# Altium PCB Sensor_Box_GPRS.PCBDOC
Units mm, origin at the board's own origin, x right, y up, seen from the top; angles counter-clockwise.
Board outline 45 x 72.8 mm, 2 copper layers (Top, Bot), stack 1.571 mm thick; 46 components, 47 nets, 198 pads, 98 vias.
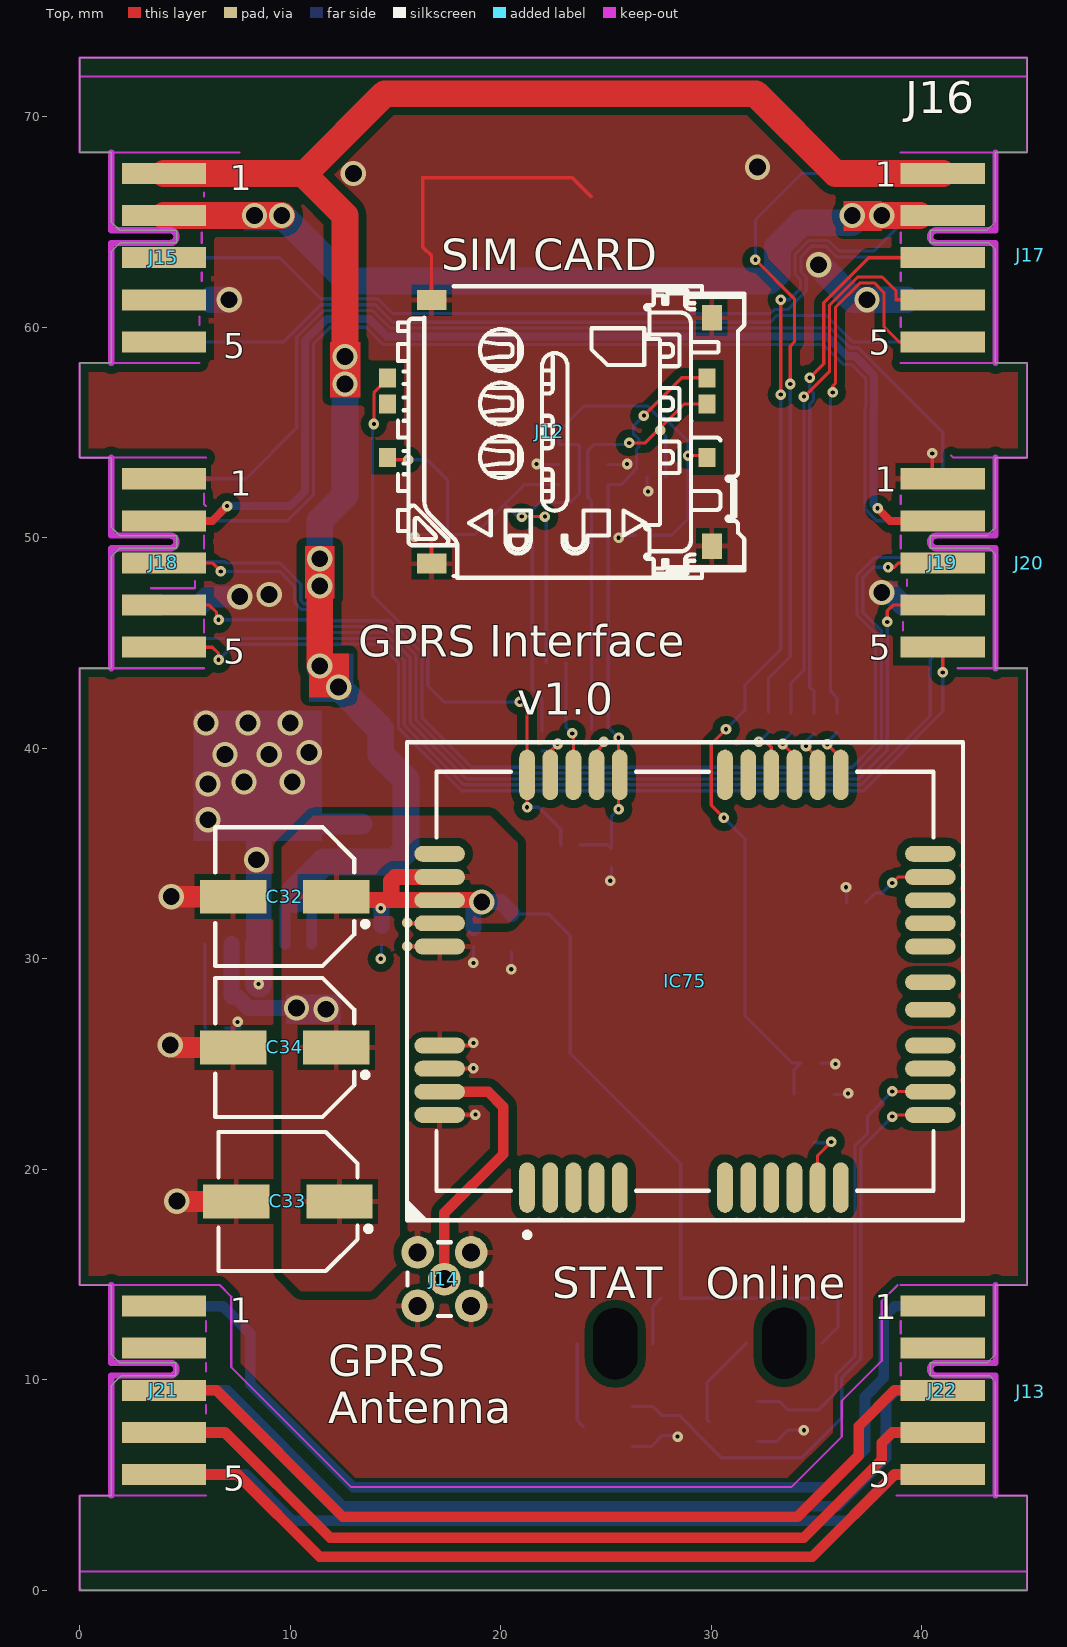
[diagram p0: Top view]
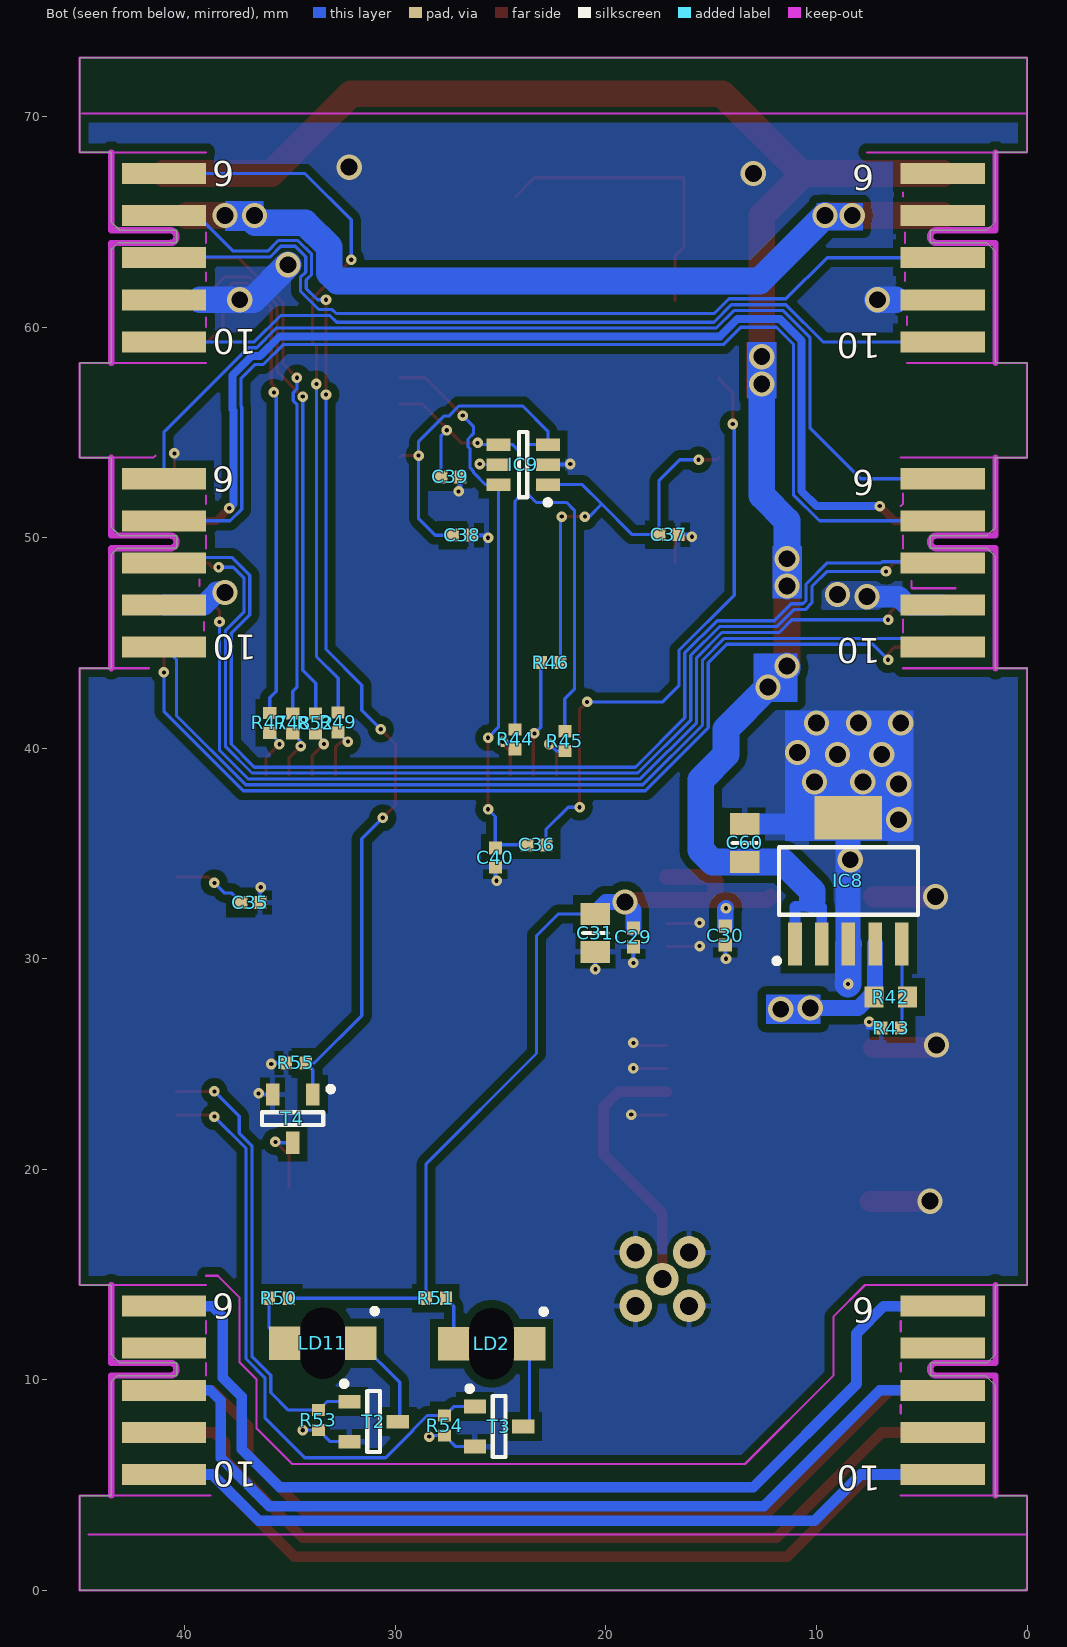
[diagram p1: Bot view, seen from below]
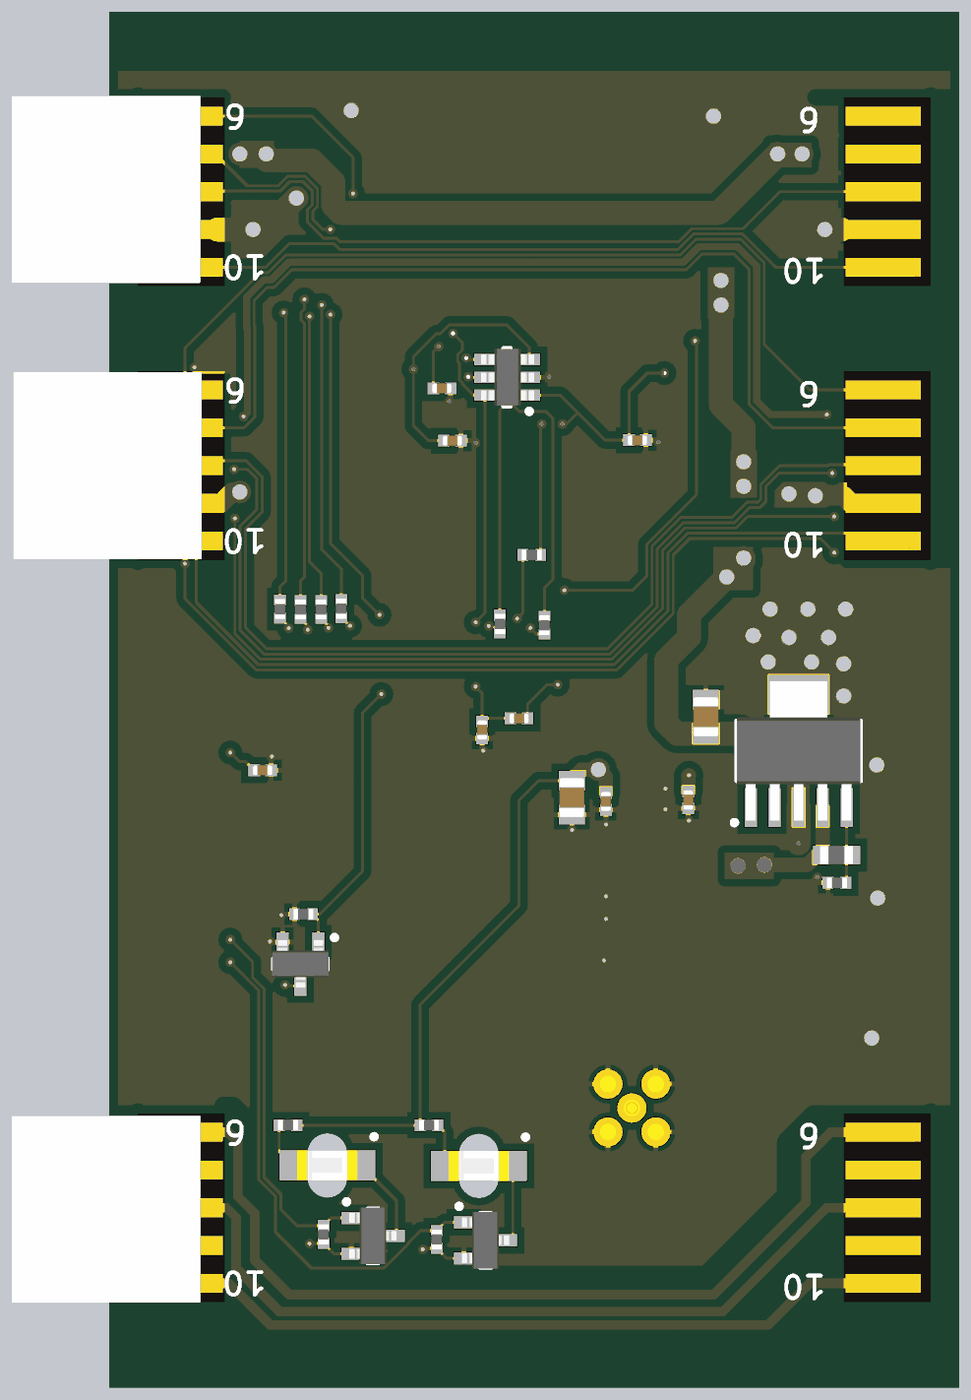
[diagram p2: 3D render of the assembled board from below, using the file's embedded part models]

## Layer stack, top to bottom
TopSolder: solder mask 0.0102, Solder Resist, Dk 3.5
Top: signal copper 0.0356
Dielectric1: core 1.5, FR-4, Dk 4.8
Bot: signal copper 0.0356
BottomSolder: solder mask 0.0102, Solder Resist, Dk 3.5

## Board outline
0,0 0,4.5 1.5,4.5 1.5,9.725 1.975,10.2 4.572,10.2 4.572,10.8 1.9,10.8 1.5,11.2 1.5,14.5 0,14.5 0,43.8 1.5,43.8 1.5,49.1 1.9,49.5 4.6,49.5 4.6,50.1 1.9,50.1 1.5,50.5 1.5,53.8 0,53.8 0,58.3 1.5,58.3 1.5,63.6 1.9,64 4.6,64 4.6,64.6 1.9,64.6 1.5,65 1.5,68.3 0,68.3 0,72.8 45,72.8 45,68.3 43.5,68.3 43.5,65 43.1,64.6 40.4,64.6 40.4,64 43.2,64 43.4,63.8 43.5,63.7 43.5,58.3 45,58.3 45,53.8 43.5,53.8 43.5,50.5 43.1,50.1 40.4,50.1 40.4,49.5 43.2,49.5 43.4,49.3 43.5,49.2 43.5,43.8 45,43.8 45,14.5 43.5,14.5 43.5,11.2 43.1,10.8 40.4,10.8 40.4,10.2 43.2,10.2 43.5,9.9 43.5,4.5 45,4.5 45,0

## Design rules (kind name [scope] priority, off if disabled: settings)
Clearance Clearance_DIFF [(InDifferentialPairClass('All Differential Pairs'))] p1: gap=0.127 ignorepadtopadclearanceinfootprint=FALSE except(0: Arc-Hole Track-Hole SMDPad-Hole THPad-Hole Via-Hole Fill-Hole Poly-Hole Region-Hole Text-Hole; 0.254: Arc-Poly Track-Poly SMDPad-Poly THPad-Poly Via-Poly Fill-Poly Poly-Poly Poly-Region Poly-Text)
Clearance [All] p2: gap=0.127 ignorepadtopadclearanceinfootprint=FALSE except(0: Arc-Hole Track-Hole SMDPad-Hole THPad-Hole Via-Hole Fill-Hole Poly-Hole Region-Hole Text-Hole; 0.381: Arc-Poly Track-Poly SMDPad-Poly THPad-Poly Via-Poly Fill-Poly Poly-Poly)
DiffPairsRouting [All] p1: maxlimit=0.254 minlimit=0.127 mostfreqgap=0.127 toplayer_minwidth=0.127 toplayer_maxwidth=0.381 toplayer_prefwidth=0.254 bottomlayer_minwidth=0.127 bottomlayer_maxwidth=0.381 bottomlayer_prefwidth=0.254 maxuncoupledlength=12.7
FabricationTestPointUsage TestPointUsage [All] p1: valid=0 allowmultiple=FALSE
FabricationTestpoint Testpoint [All] p1: side=3 testpointundercomponent=TRUE minsize=1.016 maxsize=2.54 preferedsize=1.524 minholesize=0.508 maxholesize=1.016 preferedholesize=0.813 testpointgrid=0.025 allowsidetop=TRUE allowsidebottom=TRUE usegrid=TRUE gridtolerance=0
HoleSize [All] p1: absolutevalues=TRUE maxlimit=3.81 minlimit=0.025 maxpercent=80.000 minpercent=20.000
HoleToHoleClearance [All] p1: gap=0.025 allowstackedmicrovias=TRUE
MinimumSolderMaskSliver [All] p1: minsoldermaskwidth=0
PlaneClearance [All] p1: clearance=0.254
PlaneConnect [All] p1: planeconnectstyle=Direct reliefexpansion=0.508 reliefentries=4 reliefconductorwidth=0.254 reliefairgap=0.254
PolygonConnect PolygonConnect_pad [(InPadClass('All Pads'))] p1: connectstyle=Relief reliefconductorwidth=0.254 reliefentries=4 polygonreliefangle="90 Angle" airgapwidth=0.254
PolygonConnect [All] p2: connectstyle=Direct reliefconductorwidth=0.254 reliefentries=4 polygonreliefangle="45 Angle" airgapwidth=0.254
RoomDefinition Sensor_Box_GPRS [InComponentClass('Sensor_Box_GPRS')] p1 off: confinementstyle=ConfineIn formatcopy=TRUE lockcomponents=FALSE outline 65.65,12.65 248.399,12.65 248.399,36.4 65.65,36.4
RoutingVias [All] p1: holewidth=0.2 width=0.5 viastyle="Through Hole" minholewidth=0.2 minwidth=0.5 maxholewidth=0.8 maxwidth=1.3
SilkToSilkClearance [All] p1: silktosilkclearance=0
SilkToSolderMaskClearance SilkscreenOverComponentPads [IsPad] p1: minsilkscreentomaskgap=0 clearancetoexposedcopper=TRUE
SolderMaskExpansion [All] p1: expansion=0.051
Width [All] p1: maxlimit=1.27 minlimit=0.127 preferedwidth=0.127
20 further rules are at their usual default settings.

## Components (designator, comment, footprint, x,y, rotation, side; value= is the part's Value field where it differs from the comment)
C29 "33pF" CAPC1005X55N 18.704,31.018 r90 bottom
C30 "1uF" CAPC1005X55N 14.335,31.095 r90 bottom
C31 "10uF" CAPC2012X135N 20.507,31.222 r270 bottom
C32 "100uF" CAPAE660X540N 9.738,32.949 r180 top
C33 "100uF" CAPAE660X540N 9.89,18.471 r180 top
C34 "100uF" CAPAE660X540N 9.738,25.786 r180 top
C35 "1uF" CAPC1005X55N 36.89,32.669 r0 bottom
C36 "100nF" CAPC1005X55N 23.301,35.413 r180 bottom
C37 "33pF" CAPC1005X55N 17.027,50.145 r0 bottom
C38 "33pF" CAPC1005X55N 26.832,50.119 r0 bottom
C39 "33pF" CAPC1005X55N 27.391,52.888 r0 bottom
C40 "33pF" CAPC1005X55N 25.257,34.803 r90 bottom
C60 "10uF" CAPC2012X135N 13.4,35.5 r90 bottom
IC8 "MCP1826T-ADJE/DC" SOT127P700X180-6N 8.486,33.693 r90 bottom
IC9 "PESD3V3S4UD" SOT457 23.936,53.472 r0 bottom
IC75 "M95FA-03-STD" QUEC-M95FA-03-STD_V 28.753,28.931 r90 top
J12 "Micro-SIM" MOLEX_78800-0001 23.086,55.022 r180 top
J13 "=Family" "AVX_00 9159 010 061 916" 45.187,9.423 r180 top
J14 "Coax_1Female_1Shield" NINIGI_MMCX-10 17.323,14.783 r0 top
J15 "=Family" EDGE10T1B6_P200W1000L0F100X400 4,67.3 r270 top locked
J16 "=Family" EDGE10T5B10_P200W1000L0F100X400 41,59.3 r90 top locked
J17 "=Family" "AVX_00 9159 010 061 916" 45.187,63.424 r180 top
J18 "=Family" EDGE10T1B6_P200W1000L0F100X400 4,52.8 r270 top locked
J19 "=Family" EDGE10T5B10_P200W1000L0F100X400 41,44.8 r90 top locked
J20 "=Family" "AVX_00 9159 010 061 916" 45.11,48.793 r180 top
J21 "=Family" EDGE10T1B6_P200W1000L0F100X400 4,13.5 r270 top locked
J22 "=Family" EDGE10T5B10_P200W1000L0F100X400 41,5.5 r90 top locked
LD2 "Green" LED_KINGBRIGHT_KPTR3216 25.435,11.714 r180 bottom
LD11 "Green" LED_KINGBRIGHT_KPTR3216 33.461,11.74 r180 bottom
R42 "43k" RESC1608X55N 6.48,28.181 r0 bottom
R43 "4k7" RESC1005X40N 6.454,26.708 r180 bottom
R44 "22" RESC1005X40N 24.317,40.416 r90 bottom
R45 "22" RESC1005X40N 21.955,40.34 r90 bottom
R46 "22" RESC1005X40N 22.631,44.069 r180 bottom
R47 "330" RESC1005X40N 35.973,41.2 r90 bottom
R48 "330" RESC1005X40N 34.88,41.175 r90 bottom
R49 "330" RESC1005X40N 32.721,41.225 r90 bottom
R50 "1k" RESC1005X40N 35.544,13.873 r180 bottom
R51 "1k" RESC1005X40N 28.076,13.873 r0 bottom
R52 "330" RESC1005X40N 33.788,41.175 r90 bottom
R53 "100k" RESC1005X40N 33.657,8.09 r90 bottom
R54 "100k" RESC1005X40N 27.67,7.828 r90 bottom
R55 "100k" RESC1005X40N 34.731,25.049 r180 bottom
T2 "BSS138LT1G" SOT95P240X110-3N 31.041,8.014 r180 bottom
T3 "BSS138LT1G" SOT95P240X110-3N 25.079,7.777 r180 bottom
T4 "BSS138LT1G" SOT95P240X110-3N 34.884,22.408 r270 bottom

## Footprints (in the part's own frame and the unit in brackets; to place one, negate y for a bottom-side part, rotate by r counter-clockwise, add the part's x,y. Pads: shape width x height; smd on the part's side, far side on the other; paste and mask are expansions set on the pad)
"AVX_00 9159 010 061 916" [mm] "10 Contacts, 2mm Pitch, Open Ended Card Edge Connector, 9159 Series"
  body extent -5,-4.95 5,4.95, height 1.7
CAPAE660X540N [mm] "Capacitor, Aluminium Electrolytric, 6.6mm L X 6.6mm W X 5.4mm H, IPC Medium Density"
  rect 3.15x1.6 smd: 1(-2.45,0) 2(2.45,0)
  silkscreen extent -3.95,-3.3 3.3,3.3, body extent -3.9,-3.4 3.9,3.4, height 5.7
CAPC1005X55N [mm] "Chip Capacitor, Body 1.0x0.55mm, IPC Medium Density"
  rect 0.62x0.62 smd: 1(-0.45,0) 2(0.45,0)
  body extent -0.52,-0.27 0.53,0.28, height 0.55
CAPC2012X135N [mm] "Chip Capacitor, Body 2.0x1.25mm, IPC Medium Density"
  rect 1.05x1.4 smd: 1(-0.9,0) 2(0.9,0)
  silkscreen extent 0,-0.58 0,0.58, body extent -1.05,-0.67 1.05,0.68, height 1.25
EDGE10T1B6_P200W1000L0F100X400 [mm] "10 contacts Board Edge Connector, First Left Top Pad 1, First Left Bottom Pad 2, Pitch 2mm, Length 0mm, Width 10mm, Finger Lenght 4mm, Finger Width 1mm"
  rect 1x4 smd paste-0.5: 1(0,0) 2(2,0) 3(4,0) 4(6,0) 5(8,0)
  rect 1x4 smd far side paste-0.5: 6(0,0) 7(2,0) 8(4,0) 9(6,0) 10(8,0)
  KeepOutLayer lines w0.3: 9,-2.5 3.3,-2.5 3.3,0.3 ccw(c3,0.3) 2.7,0.3 2.7,-2.5 -1,-2.5
EDGE10T5B10_P200W1000L0F100X400 [mm] "10 contacts Board Edge Connector, First Left Top Pad 5, First Left Bottom Pad 10, Pitch 2mm, Length 0mm, Width 10mm, Finger Lenght 4mm, Finger Width 1mm"
  rect 1x4 smd paste-0.5: 1(8,0) 2(6,0) 3(4,0) 4(2,0) 5(0,0)
  rect 1x4 smd far side paste-0.5: 6(8,0) 7(6,0) 8(4,0) 9(2,0) 10(0,0)
  KeepOutLayer lines w0.3: -1,-2.5 4.7,-2.5 4.7,0.3 cw(c5,0.3) 5.3,0.3 5.3,-2.5 9,-2.5
LED_KINGBRIGHT_KPTR3216 [mm] "Reverse Mount LED 3216, Hole 2.1x2.3mm 0.35mm Height"
  rect 1.5x1.6 smd: 1(1.8,0) 2(-1.8,0)
  oval 1.9x3.2 hole 2.1 slot 3.4 at 90 deg unplated mask+0.1: 3(0,0)
  silkscreen extent 2.35,1.4 2.6,1.65, body extent -1.6,-0.8 1.6,0.8, height 0.25
MOLEX_78800-0001 [mm] "1.50mm Height Hinged-style micro-SIM Card Socket Without Detect Switch, Surface Mount, 6 Circuits, Low-Halogen, Lead-Free"
  rect 0.8x0.9 smd: C1(-6.71,-2.57) C2(-6.71,-1.33) C3(-6.71,1.21) C5(8.46,-2.57) C6(8.46,-1.33) C7(8.46,1.21)
  rect 0.95x1.2 smd: SHIELD(-6.94,-5.425) SHIELD(-6.94,5.425)
  rect 1.4x0.95 smd: SHIELD(6.37,6.26) SHIELD(6.37,-6.26)
  silkscreen extent -8.48,-6.93 7.97,6.93, body extent -8.48,-6.92 8.48,6.93, height 1.5
NINIGI_MMCX-10 [mm] "Straight Through-hole 50 Ohm Micro Mini RF Jack, MMCX Serie"
  round 1.55 hole 0.85: 1(0,0) 2(-1.27,-1.27) 2(-1.27,1.27) 2(1.27,-1.27) 2(1.27,1.27)
  silkscreen extent -1.75,-1.75 1.75,1.75, body extent -1.75,-1.75 1.75,1.75, height 4.35
QUEC-M95FA-03-STD_V [mm] "Module, 42-Leads, Body 23.6x19.9mm"
  oval 2.4x0.75 smd paste+0: 1(-9.8,7.5) 2(-9.8,6.4) 3(-9.8,5.3) 4(-9.8,4.2) 5(-9.8,3.1) 6(-9.8,-1.9) 7(-9.8,-3) 8(-9.8,-4.1) 9(-9.8,-5.2) 10(-9.8,-6.3) 11(-9.8,-7.4) 21(9.8,-7.4) 22(9.8,-6.3) 23(9.8,-5.2) 24(9.8,-4.1) 25(9.8,-3) 26(9.8,-1.9) 27(9.8,3.1) 28(9.8,4.2) 29(9.8,5.3) 30(9.8,6.4) 31(9.8,7.5)
  oval 0.75x2.4 smd paste+0: 12(-6.35,-11.65) 13(-5.25,-11.65) 14(-4.15,-11.65) 15(-3.05,-11.65) 16(1.65,-11.65) 17(2.75,-11.65) 18(3.85,-11.65) 19(4.95,-11.65) 20(6.05,-11.65) 32(6.05,11.65) 33(4.95,11.65) 34(3.85,11.65) 35(2.75,11.65) 36(1.65,11.65) 37(-3.05,11.65) 38(-4.15,11.65) 39(-5.25,11.65) 40(-6.35,11.65) 41(-1.35,-11.65) 42(-0.05,-11.65)
  silkscreen extent -12.17,-13.2 11.35,13.2, body extent -9.95,-11.8 9.95,11.8, height 2.65
RESC1005X40N [mm] "Chip Resistor, EIA 0402, Metric 1005, Body 1.0x0.5mm, IPC Medium Density"
  rect 0.58x0.62 smd: 1(-0.47,0) 2(0.47,0)
  body extent -0.52,-0.27 0.53,0.28, height 0.4
RESC1608X55N [mm] "Chip Resistor, EIA 0603, Metric 1608, Body 1.6x0.8mm, IPC Medium Density"
  rect 0.9x1 smd: 1(-0.8,0) 2(0.8,0)
  body extent -0.87,-0.47 0.88,0.48, height 0.55
SOT95P240X110-3N [mm] "SOT23 3-Leads, Pitch 0.95mm, Body 1.3x2.9mm, IPC Medium Density"
  rect 1.05x0.65 smd: 1(-1.15,0.95) 2(-1.15,-0.95) 3(1.15,0)
  silkscreen extent -1.53,-1.45 0.3,1.92, body extent -1.25,-1.5 1.25,1.5, height 1.1
SOT127P700X180-6N [mm] "SOT223, 6-Leads, Body 6.6x7.3mm (max), Pitch 1.27mm, IPC Medium Density"
  rect 2.05x0.65 smd: 1(-3,2.54) 2(-3,1.27) 3(-3,0) 4(-3,-1.27) 5(-3,-2.54)
  rect 2.05x3.2 smd: 6(3,0)
  silkscreen extent -3.92,-3.3 1.6,3.53, body extent -3.68,-3.27 3.68,3.28, height 1.8
SOT457 [mm] "SOT23, 6-Leads, Body 3.1x3.0mm (max), Pitch 0.95mm, IPC Medium Density"
  rect 1.15x0.6 smd: 1(-1.175,0.95) 2(-1.175,0) 3(-1.175,-0.95) 4(1.175,-0.95) 5(1.175,0) 6(1.175,0.95)
  silkscreen extent -1.3,-1.55 0.2,1.92, body extent -1.43,-1.5 1.37,1.5, height 1.45

## Part data
C29 C37 C38 C39 C40: library part CC0402_33PF_50V_5%_C0G, "Non-polarised capacitor", Case=0402, Manufacturer=GENERIC, Manufacturer1 ComponentHeight=0.55mm, Manufacturer1 Example=KEMET, Manufacturer1 Part Number=C0402C330J5GACTU, Tolerance=±5%, Voltage=50V, Author="CERN DEM JLC", Component Type=Standard, CreateDate=03.12.2007, HelpURL="\\cern.ch\dfs\Applications\Altium\Datasheets\CC0805_C0G_KEMET_(Commercial Grade).pdf", LatestRevisionDate=22.04.2015, Manufacturer Part Number=CC0402_33PF_50V_5%_C0G, Mounted=Yes, Part Description="SMD Multilayer Chip Ceramic Capacitor", Part Number=CC0402_33PF_50V_5%_C0G, Pin Count=2, Sense=No, SMD=Yes, Socket=No, Status=Preferred, TC=C0G/NP0
C30 C35: library part CC0402_1UF_16V_10%_X5R, "Non-polarised capacitor", Case=0402, Manufacturer=GENERIC, Manufacturer1 ComponentHeight=0.55mm, Manufacturer1 Example=TDK, Manufacturer1 Part Number=C1005X5R1C105KT, Tolerance=±10%, Voltage=16V, Author="CERN DEM JLC", Component Type=Standard, CreateDate=25.10.2012, HelpURL=\\cern.ch\dfs\Applications\Altium\Datasheets\CC0402_X5R_TDK_C.pdf, LatestRevisionDate=25.10.2012, Manufacturer Part Number=CC0402_1UF_16V_10%_X5R, Mounted=Yes, Part Description="SMD Multilayer Chip Ceramic Capacitor", Part Number=CC0402_1UF_16V_10%_X5R, Pin Count=2, Sense=No, SMD=Yes, Socket=No, Status=Preferred, TC=X5R
C31 C60: library part CC0805_10UF_16V_10%_X5R, "Non-polarised capacitor", Case=0805, Manufacturer=GENERIC, Manufacturer1 ComponentHeight=1.4mm, Manufacturer1 Example=KEMET, Manufacturer1 Part Number=C0805C106K4PAC, Tolerance=±10%, Voltage=16V, Author="CERN DEM JLC", Component Type=Standard, CreateDate=03.12.2007, HelpURL=\\cern.ch\dfs\Applications\Altium\Datasheets\CC1206_X5R_KEMET.pdf, LatestRevisionDate=03.12.2007, Manufacturer Part Number=CC0805_10UF_16V_10%_X5R, Mounted=Yes, Part Description="SMD Multilayer Chip Ceramic Capacitor", Part Number=CC0805_10UF_16V_10%_X5R, Pin Count=2, Sense=No, SMD=Yes, Socket=No, Status=Preferred, TC=X5R
C32 C33 C34: library part CAE660-540_100UF_16V_20%, "Polarised capacitor", Case=D, Manufacturer=PANASONIC, Manufacturer Part Number=EEEFK1C101AP, Tolerance=±20%, Voltage=16V, Author="CERN DEM JLC", ComponentHeight=5.8mm, Component Type=Standard, CreateDate=03.12.2007, HelpURL=\\cern.ch\dfs\Applications\Altium\Datasheets\CAE_PANASONIC_FK.pdf, LatestRevisionDate=05.11.2014, Mounted=Yes, Part Description="Aluminum Electrolytic SMT Capacitor", Part Number=CAE660-540_100UF_16V_20%, Pin Count=2, Sense=No, SMD=Yes, Socket=No, Status="Not Recommended"
C36: library part CC0402_100NF_16V_10%_X7R, "Non-polarised capacitor", Case=0402, Manufacturer=GENERIC, Manufacturer1 ComponentHeight=0.55mm, Manufacturer1 Example=MURATA, Manufacturer1 Part Number=GRM155R71C104KA88D, Tolerance=±10%, Voltage=16V, Author="CERN DEM JLC", Component Type=Standard, CreateDate=05.12.2013, HelpURL=\\cern.ch\dfs\Applications\Altium\Datasheets\CC0402_X7R_MURATA_GRM.pdf, LatestRevisionDate=03.12.2007, Manufacturer Part Number=CC0402_100NF_16V_10%_X7R, Mounted=Yes, Part Description="SMD Multilayer Chip Ceramic Capacitor", Part Number=CC0402_100NF_16V_10%_X7R, Pin Count=2, Sense=No, SMD=Yes, Socket=No, Status="Not Recommended", TC=X7R
IC8: "0.8V to 5.0V, 1A Low Voltage, Low Quiescent Current, Adjustable Positive LDO Regulator", Case=SOT223, Manufacturer="MICROCHIP TECHNOLOGY", Author="CERN DEM JLC", Bonding=No, ComponentHeight=1.8mm, Component Type=Standard, CreateDate=03.10.2012, Device=MCP1826T-ADJE/DC, HelpURL=\\cern.ch\dfs\Applications\Altium\Datasheets\MCP1826T-ADJE-DC.pdf, LatestRevisionDate=03.10.2012, Manufacturer Part Number=MCP1826T-ADJE/DC, Mounted=Yes, PackageDescription="SOT223, 6-Leads, Body 6.6x7.3mm (max), Pitch 1.27mm, IPC Medium Density", Part Description="0.8V to 5.0V, 1A Low Voltage, Low Quiescent Current, Adjustable Positive LDO Regulator", Part Number=MCP1826T-ADJE/DC, Pin Count=6, PressFit=No, Sense=No, SMD=Yes, Socket=No
IC9: library part D_TVS_PESD3V3S4UD, "3.3V TVS"
IC75: library part CMP-2000-06650-1, "Quad-Band GSM / GPRS Module, 850 / 900 / 1800 / 1900 MHz, 3.3 to 4.6 V, -40 to 85 degC, 42-Pin SMD, RoHS, Tape and Reel", Manufacturer=QUECTELWIRELESSSOLUTIONS, Operating Temperature=-40to85°C, Package=42LCC, Package Description="42-Pin Sourface Mount Device, Body 23.6 x 19.9 mm", Category=RFModulesMisc, Datasheet URL=https://www.codico.com/shop/media/datasheets/Quectel_M95_Hardware_Design_V3.1.pdf, Datasheet Version="Rev. 3.1, 11/2014", Manufacturer URL=http://www.quectel.com/, Mounting Technology=SurfaceMount, Package Reference=M95FA-03-STD
J12: library part MOLEX_78800-0001, "6 Contacts + Shield SIM Connector", Manufacturer=MOLEX, Manufacturer Part Number=78800-0001, Author="CERN DEM MR", ComponentHeight=1.6mm, Component Type=Standard, CreateDate=30.01.2018, Family=Micro-SIM, HelpURL=\\cern.ch\dfs\Applications\Altium\Datasheets\MOLEX_78800-0001.pdf, LatestRevisionDate=30.01.2018, Mounted=Yes, Part Description="1.50mm Height Hinged-style micro-SIM Card Socket Without Detect Switch, Surface Mount, 6 Circuits, Low-Halogen, Lead-Free", Part Number=MOLEX_78800-0001, Pin Count=6, PressFit=No, Sense=No, SMD=Yes, Socket=No, Status=None
J13 J17 J20: library part "AVX_00 9159 010 061 916", "Open Ended Card Edge Connector, 9159 Series", Manufacturer=AVX, Manufacturer Part Number="00 9159 010 061 916", Author="CERN DEM MR", ComponentHeight=1.6mm, Component Type=Standard, CreateDate=13.02.2018, HelpURL="\\cern.ch\dfs\Applications\Altium\Datasheets\AVX_00 9159 010 061 916.pdf", LatestRevisionDate=13.02.2018, Mounted=Yes, Part Description="10 Contacts, 2mm Pitch, Open Ended Card Edge Connector, 9159 Series", Part Number="AVX_00 9159 010 061 916", Pin Count=10, PressFit=No, Sense=No, SMD=No, Socket=No, Status=None
J14: Manufacturer=NINIGI, Manufacturer Part Number="NINIGI MMCX-10", Part Number=MMCX-10, Author=GK, ComponentHeight=4.35mm, Component Type=Standard, CreateDate=05.12.2012, HelpURL=\\cern.ch\dfs\Applications\Altium\Datasheets\SAMTEC_MMCX-J-P-H-ST-TH1.pdf, LatestRevisionDate=05.12.2012, Mounted=Yes, Part Description="Straight Through-hole 50 Ohm Micro Mini RF Jack, MMCX Series", Pin Count=2, PressFit=No, Sense=No, SMD=No, Socket=No, Status=None
J15 J18 J21: library part EDGE10T1B6_P200W1000L0F100X400, "PCB Edge Connector 10 (2x5)", Author="CERN DEM MR", ComponentHeight=0mm, Component Type="Standard (No BOM)", CreateDate=14.02.2018, HelpURL=\\cern.ch\dfs\Applications\Altium\Datasheets\EDGE10T1B6_P200W1000L0F100X400.pdf, LatestRevisionDate=14.02.2018, Mounted=No, Part Description="10 Contacts Board Edge Connector, Pitch 2mm, Length 0mm, Width 10mm, Finger Lenght 4mm, Finger Width 1mm", Part Number=EDGE10T1B6_P200W1000L0F100X400, Pin Count=10, PressFit=No, Sense=No, SMD=No, Socket=No, Status=None
J16 J19 J22: library part EDGE10T5B10_P200W1000L0F100X400, "PCB Edge Connector 10 (2x5)", Author="CERN DEM MR", ComponentHeight=0mm, Component Type="Standard (No BOM)", CreateDate=14.02.2018, HelpURL=\\cern.ch\dfs\Applications\Altium\Datasheets\EDGE10T5B10_P200W1000L0F100X400.pdf, LatestRevisionDate=14.02.2018, Mounted=No, Part Description="10 Contacts Board Edge Connector, Pitch 2mm, Length 0mm, Width 10mm, Finger Lenght 4mm, Finger Width 1mm", Part Number=EDGE10T5B10_P200W1000L0F100X400, Pin Count=10, PressFit=No, Sense=No, SMD=No, Socket=No, Status=None
LD2 LD11: library part LED_KINGBRIGHT_KPTR-3216CGCK, "LED Green 1A 2C", Manufacturer=KINGBRIGHT, Manufacturer Part Number=KPTR-3216CGCK, Author="CERN DEM MR", Bonding=No, Color=Green, ComponentHeight=0.35mm, Component Type=Standard, CreateDate=15.02.2016, HelpURL=\\cern.ch\dfs\Applications\Altium\Datasheets\LED_KINGBRIGHT_KPTR-3216CGCK.pdf, LatestRevisionDate=15.02.2016, Mounted=Yes, PackageDescription="Reverse Mount LED 3216, Hole 2.1x2.3mm 0.35mm Height", Part Description="Reverse Mount LED 1.4x1.6mm Green", Part Number=LED_KINGBRIGHT_KPTR-3216CGCK, Pin Count=2, PressFit=No, Sense=No, SMD=Yes, Socket=No
R42: library part R0603_43K_1%_0.1W_100PPM, "Resistor - 1%", Case=0603, Manufacturer=GENERIC, Manufacturer1 ComponentHeight=0.55mm, Manufacturer1 Example="NIC COMPONENT", Manufacturer1 Part Number=NRC06F4302TRF, Power=0.1W, Tolerance=±1%, Author="CERN DEM JLC", Component Type=Standard, CreateDate=03.12.2007, HelpURL=\\cern.ch\dfs\Applications\Altium\Datasheets\R0603_NIC_NRC.pdf, LatestRevisionDate=13.03.2008, Manufacturer Part Number=R0603_43K_1%_0.1W_100PPM, Mounted=Yes, Part Description="General Purpose Thick Film Chip Resistor", Part Number=R0603_43K_1%_0.1W_100PPM, Pin Count=2, PressFit=No, Sense=No, SMD=Yes, Socket=No, Status=Preferred, TC=±100ppm/°C
R43: library part R0402_4K7_1%_0.0625W_100PPM, "Resistor - 1%", Case=0402, Manufacturer=GENERIC, Manufacturer1 ComponentHeight=0.4mm, Manufacturer1 Example="YAGEO PHYCOMP", Manufacturer1 Part Number=232270674702L, Power=0.0625W, Tolerance=±1%, Author="CERN DEM JLC", Component Type=Standard, CreateDate=03.12.2007, HelpURL=\\cern.ch\dfs\Applications\Altium\Datasheets\R0402_Phycomp_RC0402.pdf, LatestRevisionDate=17.10.2012, Manufacturer Part Number=R0402_4K7_1%_0.0625W_100PPM, Mounted=Yes, Part Description="General Purpose Thick Film Chip Resistor", Part Number=R0402_4K7_1%_0.0625W_100PPM, Pin Count=2, PressFit=No, Sense=No, SMD=Yes, Socket=No, Status="Not Recommended", TC=±100ppm/°C
R44 R45 R46: library part R0402_22R_1%_0.0625W_100PPM, "Resistor - 1%", Case=0402, Manufacturer=GENERIC, Manufacturer1 ComponentHeight=0.4mm, Manufacturer1 Example="YAGEO PHYCOMP", Manufacturer1 Part Number=232270672209L, Power=0.0625W, Tolerance=±1%, Author="CERN DEM JLC", Component Type=Standard, CreateDate=03.12.2007, HelpURL=\\cern.ch\dfs\Applications\Altium\Datasheets\R0402_Phycomp_RC0402.pdf, LatestRevisionDate=17.10.2012, Manufacturer Part Number=R0402_22R_1%_0.0625W_100PPM, Mounted=Yes, Part Description="General Purpose Thick Film Chip Resistor", Part Number=R0402_22R_1%_0.0625W_100PPM, Pin Count=2, PressFit=No, Sense=No, SMD=Yes, Socket=No, Status="Not Recommended", TC=±100ppm/°C
R47 R48 R49 R52: library part R0402_330R_1%_0.0625W_100PPM, "Resistor - 1%", Case=0402, Manufacturer=GENERIC, Manufacturer1 ComponentHeight=0.4mm, Manufacturer1 Example="YAGEO PHYCOMP", Manufacturer1 Part Number=232270673301L, Power=0.0625W, Tolerance=±1%, Author="CERN DEM JLC", Component Type=Standard, CreateDate=03.12.2007, HelpURL=\\cern.ch\dfs\Applications\Altium\Datasheets\R0402_Phycomp_RC0402.pdf, LatestRevisionDate=17.10.2012, Manufacturer Part Number=R0402_330R_1%_0.0625W_100PPM, Mounted=Yes, Part Description="General Purpose Thick Film Chip Resistor", Part Number=R0402_330R_1%_0.0625W_100PPM, Pin Count=2, PressFit=No, Sense=No, SMD=Yes, Socket=No, Status="Not Recommended", TC=±100ppm/°C
R50 R51: library part R0402_1K_1%_0.0625W_100PPM, "Resistor - 1%", Case=0402, Manufacturer=GENERIC, Manufacturer1 ComponentHeight=0.4mm, Manufacturer1 Example="YAGEO PHYCOMP", Manufacturer1 Part Number=232270671002L, Power=0.0625W, Tolerance=±1%, Author="CERN DEM JLC", Component Type=Standard, CreateDate=03.12.2007, HelpURL=\\cern.ch\dfs\Applications\Altium\Datasheets\R0402_Phycomp_RC0402.pdf, LatestRevisionDate=17.10.2012, Manufacturer Part Number=R0402_1K_1%_0.0625W_100PPM, Mounted=Yes, Part Description="General Purpose Thick Film Chip Resistor", Part Number=R0402_1K_1%_0.0625W_100PPM, Pin Count=2, PressFit=No, Sense=No, SMD=Yes, Socket=No, Status="Not Recommended", TC=±100ppm/°C
R53 R54 R55: library part R0402_100K_1%_0.0625W_100PPM, "Resistor - 1%", Case=0402, Manufacturer=GENERIC, Manufacturer1 ComponentHeight=0.4mm, Manufacturer1 Example="YAGEO PHYCOMP", Manufacturer1 Part Number=232270671004L, Power=0.0625W, Tolerance=±1%, Author="CERN DEM JLC", Component Type=Standard, CreateDate=03.12.2007, HelpURL=\\cern.ch\dfs\Applications\Altium\Datasheets\R0402_Phycomp_RC0402.pdf, LatestRevisionDate=17.10.2012, Manufacturer Part Number=R0402_100K_1%_0.0625W_100PPM, Mounted=Yes, Part Description="General Purpose Thick Film Chip Resistor", Part Number=R0402_100K_1%_0.0625W_100PPM, Pin Count=2, PressFit=No, Sense=No, SMD=Yes, Socket=No, Status="Not Recommended", TC=±100ppm/°C
T2 T3 T4: "N-CHANNEL MOSFET WITH DIODE", Case=SOT23-3, Manufacturer="ON SEMICONDUCTOR", Author="CERN DEM JLC", Bonding=No, ComponentHeight=1.11mm, Component Type=Standard, CreateDate=23.03.2009, Device=BSS138LT1G, HelpURL=\\cern.ch\dfs\Applications\Altium\Datasheets\BSS138LT1G.pdf, LatestRevisionDate=23.03.2009, Manufacturer Part Number=BSS138LT1G, Mounted=Yes, PackageDescription="SOT23 3-Leads, Pitch 0.95mm - Body 1.4x3mm, IPC Medium Density", Part Description="50V 200mA N-Channel Enhancement Mode Field-Effect Transistor", Part Number=BSS138LT1G, Pin Count=3, PressFit=No, Sense=No, SMD=Yes, Socket=No

## Via types
v1: diameter 0.5, hole 0.2, Top to Bot, tented both sides, 63 vias
v2: diameter 1.2, hole 0.8, Top to Bot, tented both sides, 35 vias

## Nets (pads, with @x,y where several pads share a name; then routed paths per layer and width w, separated by ;. In a path a pad name is that pad's centre, name@x,y a point inside that pad or via, vN(x,y) a via of type N, cw(c..) or ccw(c..) an arc to the next point about the centre after c; other vN are vias at no path point)
EMAC_MDC: J15.8 J16.8 | length 41
  Bot w0.152: J15.8 9.5,63.3 11.454,61.346 14.158,61.346 14.857,60.647 32.811,60.647 32.997,60.833 33.633,60.833 34.516,61.716 34.516,62.363 34.262,62.616 34.262,63.347 34.753,63.838 35.447,63.838 35.953,63.333 40.967,63.333 J16.8
EMAC_MDIO: J15.10 J16.10 | length 38.7
  Bot w0.152: J15.10 9.691,59.3 11.458,61.067 14.042,61.067 14.871,60.238 32.797,60.238 33.112,60.553 35.457,60.553 36.711,59.3 J16.10
GND: C29.1 C30.1 C31.2 C32.2 C33.2 C34.2 C35.1 C37.1 C38.1 C39.1 C40.1 C60.2 IC8.3 IC8.6 IC9.2 IC9.5 IC75.35 IC75.36 IC75.37 IC75.38 IC75.40 J12.SHIELD J14.2 J15.9 J16.9 J18.1 J18.9 J19.1 J19.9 R43.1 R53.1 R54.1 R55.1 T2.2 T3.2 T4.2 | length 69.2
  Top w0.152: v1(15.553,30.6) 15.572,30.581 IC75.36 ; v1(15.553,31.7) 15.572,31.681 IC75.35 ; v1(15.916,50.042) 16.016,49.942 16.575,49.942 16.716,49.801 J12.SHIELD@16.716,48.762 ; J12.SHIELD@16.716,61.282 16.716,63.384 16.3,63.8 16.3,67.1 23.4,67.1 24.3,66.2 ; IC75.40 18.781,22.581 v1(18.8,22.6) ; IC75.38 18.681,24.781 v1(18.7,24.8) ; IC75.37 18.581,25.881 v1(18.7,26) ; v1(40.5,54) 40.5,53.3 J19.1
  Top w1.016: v2@4.3,32.9 v2(4.349,32.949) C32.2 ; v2@4.5,25.8 4.514,25.786 C34.2 ; v2@4.6,18.5 v2(4.615,18.485) 4.629,18.471 C33.2
  Bot w0.152: R43.1 7.592,26.708 7.6,26.716 7.5,26.816 v1(7.5,27) ; v1(14.3,30) 14.335,30.035 C30.1 ; v1(15.916,50.042) 16.019,50.145 C37.1 ; v1(18.7,29.8) 18.704,29.804 C29.1 ; v1(20.5,29.5) 20.507,29.507 C31.2 ; v1(21.7,53.5) 21.728,53.472 IC9.2 ; IC9.5 25.972,53.472 v1(26,53.5) ; v1(25.2,33.7) 25.257,33.757 C40.1 ; v1(25.6,50) 25.719,50.119 C38.1 ; T3.2 27.139,6.827 R54.1 28.342,7.358 v1(28.4,7.3) ; C39.1 26.941,52.259 v1(27,52.2) ; T2.2 33.101,7.064 R53.1 34.38,7.62 v1(34.4,7.6) ; R55.1 35.851,25.049 v1(35.9,25) ; T4.2 36.458,23.558 v1(36.5,23.6) ; v1(36.4,33.4) 36.44,33.36 C35.1
  Bot w1.016: J18.9 5.7,46.8 6.1,47.2 v2(7.6,47.2) ; IC8.6 8.78,36.4 C60.2 ; v2(38.1,47.4) 38.5,47.4 39.1,46.8 J19.9
  Bot w1.27: 6.239,61.3 v2(7.1,61.3) ; IC8.3 8.492,30.693 8.492,28.808 v1(8.5,28.8) ; v2(35.1,62.964) 36.764,61.3 v2(37.4,61.3) J16.9@39.273,61.3
  other v2: 4.3,25.9 8.4,34.7 6.1,36.6 6.1,38.3 7.8,38.4 10.1,38.4 6.9,39.7 9,39.7 10.9,39.8 6,41.2 8,41.2 10,41.2 9,47.3 13,67.3 32.2,67.6
GSM_POW: C29.2 C30.2 C31.1 C32.1 C33.1 C34.1 IC8.4 IC75.33 IC75.34 R42.2 R50.2 R51.2 | length 50.1
  Top w0.762: C32.1 12.356,32.781 14.3,32.781 14.8,32.781 ; IC75.33 14.981,33.881 14.8,33.7 14.8,32.781 ; v2(19.1,32.7) 19.019,32.781 IC75.34 14.8,32.781
  Bot w0.152: C31.1 22.278,32.122 23.3,31.1 23.3,25.5 28.546,20.254 R51.2 R50.2
  Bot w0.762: IC8.4 7.216,28.245 R42.2 7.502,28.181 8.027,27.657 v2(10.3,27.657) 11.157,27.657 v2@11.2,27.7 ; v1(14.3,32.4) 14.335,32.365 C30.2 ; C29.2 18.704,32.304 v2(19.1,32.7) 20,32.7 20.507,32.193 C31.1
  other v2: 11.7,27.6
GSM_PWR: J16.7 R55.2 T4.1 | length 52.3
  Top w0.152: v1(30.6,36.7) 30,37.3 30,40.2 v1(30.7,40.9) ; v1(33.3,56.8) v1(33.3,61.3)
  Bot w0.152: v1(30.6,36.7) 31.6,35.7 31.6,27.3 33.851,25.049 R55.2 33.934,24.722 T4.1 ; v1(30.7,40.9) 31.6,41.8 31.6,43 33.3,44.7 v1(33.3,56.8) ; v1(33.3,61.3) 33.705,61.3 34.236,61.831 34.236,62.247 33.982,62.501 33.982,63.463 34.637,64.118 35.563,64.118 36.069,63.612 37.712,63.612 39.4,65.3 J16.7
NetC35_2: C35.2 IC75.19 | length 3.6
  Top w0.152: v1(38.6,33.6) 38.881,33.881 IC75.19
  Bot w0.152: C35.2 37.8,33.129 38.129,33.129 v1(38.6,33.6)
NetIC8_5: IC8.5 R42.1 R43.2 | length 4
  Bot w0.152: IC8.5 5.946,26.746 R43.2
NetIC75_13: IC75.13 R53.2 T2.1 | length 21.5
  Top w0.152: v1(38.6,23.7) 40.383,23.7 IC75.13
  Bot w0.152: T2.1 33.254,8.964 R53.2 35.083,8.56 35.921,9.397 35.921,10.216 36.821,11.116 36.821,21.116 37.424,21.719 37.424,22.524 v1(38.6,23.7)
NetIC75_21: IC75.21 R47.1 | length 2.5
  Top w0.152: v1(35.513,40.187) 36.153,39.547 IC75.21
  Bot w0.152: v1(35.513,40.187) 35.513,40.29 35.953,40.73 R47.1
NetIC75_22: IC75.22 R48.1 | length 2.4
  Top w0.152: v1(34.5,40.1) 35.053,39.547 IC75.22
  Bot w0.152: v1(34.5,40.1) 34.5,40.324 R48.1
NetIC75_23: IC75.23 R52.1 | length 2.4
  Top w0.152: v1(33.4,40.2) 33.953,39.647 IC75.23
  Bot w0.152: v1(33.4,40.2) 33.4,40.213 33.348,40.265 R52.1
NetIC75_24: IC75.24 R49.1 | length 2.7
  Top w0.152: v1(32.261,40.315) 32.585,40.315 32.853,40.047 IC75.24
  Bot w0.152: v1(32.261,40.315) 32.281,40.315 R49.1
NetIC75_39: IC75.39 J14.1 | length 12.7
  Top w0.508: IC75.39 19.4,23.681 20.119,22.961 20.119,20.719 17.323,17.923 J14.1
NetLD2_1: LD2.1 T3.3 | length 4.1
  Bot w0.152: LD2.1 23.635,8.072 T3.3
NetLD2_2: LD2.2 R51.1 | length 2.3
  Bot w0.152: LD2.2 27.235,13.502 R51.1
NetLD11_1: LD11.1 T2.3 | length 4.5
  Bot w0.152: T2.3 29.8,8.105 29.8,9.879 LD11.1
NetLD11_2: LD11.2 R50.1 | length 2.4
  Bot w0.152: LD11.2 36.014,12.493 R50.1
P3V3: J18.2 J19.2 | length 52.8
  Top w0.381: J18.2 6.3,50.8 v1(7,51.5) ; v1(37.9,51.4) 38.5,50.8 J19.2
  Bot w0.381: v1(7,51.5) 10,51.5 10.706,52.206 10.706,59.363 11.737,60.394 13.763,60.394 14.592,59.564 35.494,59.564 36.432,58.627 36.824,58.627 37.737,57.714 37.737,56.086 37.7,56.049 37.7,51.6 v1(37.9,51.4)
P5V0: C60.1 IC8.1 IC8.2 J15.1 J16.1 | length 86.9
  Top w1.27: J15.1 10.6,67.3 ; v2(11.4,43.9) v2(11.4,47.7) ; v2(12.6,58.6) 12.6,65.3 10.6,67.3 ; J16.1 35.9,67.3 32.112,71.088 14.488,71.088 10.7,67.3 10.6,67.3
  Bot w0.508: IC8.2 9.756,32.444 10.113,32.8 10.2,32.8 10.5,32.5 11,32.5 11.026,32.474 IC8.1
  Bot w1.27: 10.2,32.8 10.2,33.2 11.6,34.6 C60.1 14.931,34.6 15.5,35.169 15.5,38.5 14.3,39.7 14.3,40.9 v2(12.3,42.9) 11.4,43.8 v2(11.4,43.9) ; v2(11.4,47.7) v2(11.4,49) 11.4,50.8 12.6,52 v2(12.6,57.3) v2(12.6,58.6)
P12V0: J15.2 J16.2 | length 39.2
  Top w1.27: J15.2 v2(9.6,65.3) ; v2@37,65.3 J16.2@39.9,65.3
  Bot w1.27: v2(9.6,65.3) 12.712,62.188 32.757,62.188 33.144,62.575 33.144,63.81 34.29,64.956 36.656,64.956 v2@37,65.3
  other v2: 8.3,65.3 36.7,65.3 38.1,65.3
POE_VC1: J21.4 J22.4 | length 41.6
  Top w0.508: J21.4 6.9,7.5 11.9,2.5 34.4,2.5 38.1,6.2 38.1,7 38.6,7.5 J22.4
POE_VC1+: J21.3 J22.3 | length 42.8
  Top w0.508: J21.3 6.5,9.5 12.5,3.5 34.1,3.5 37,6.4 37,7.8 38.7,9.5 J22.3
POE_VC1-: J21.5 J22.5 | length 40.2
  Top w0.508: J21.5 7.5,5.5 11.4,1.6 34.8,1.6 38.7,5.5 J22.5
POE_VC2: J21.6 J22.6 | length 48.7
  Bot w0.508: J21.6 6.8,13.5 8.1,12.2 8.1,9.8 13,4.9 35.5,4.9 37.3,6.7 37.3,9.2 38.2,10.1 38.2,13 38.7,13.5 J22.6
POE_VC3: J21.8 J22.8 | length 43.1
  Bot w0.508: J21.8 7,9.5 12.5,4 36,4 38.3,6.3 38.3,9 38.8,9.5 J22.8
POE_VC4: J21.10 J22.10 | length 38.8
  Bot w0.508: J21.10 7.9,5.5 10.1,3.3 36.5,3.3 38.7,5.5 J22.10
PWRKEY: IC75.10 T4.3 | length 3.3
  Top w0.152: IC75.10 35.053,20.653 v1(35.7,21.3)
  Bot w0.152: T4.3 35.658,21.258 v1(35.7,21.3)
RX_CLK: J18.4 J19.4 | length 49.7
  Top w0.152: J18.4 6.159,46.8 6.5,46.459 6.5,46.2 v1(6.6,46.1) ; v1(38.359,46) 38.359,46.523 38.636,46.8 J19.4
  Bot w0.152: v1(6.6,46.1) 11.176,46.1 11.779,45.497 14.493,45.497 15.697,44.293 15.697,41.213 18.369,38.541 37.005,38.541 38.359,39.895 v1(38.359,46)
RX_DV: J18.3 J19.3 | length 53.5
  Top w0.152: J18.3 6.3,48.8 v1(6.7,48.4) ; v1(38.4,48.6) 38.7,48.6 38.9,48.8 J19.3
  Bot w0.152: v1(6.7,48.4) 9.5,48.4 10.217,47.683 10.217,46.9 10.535,46.582 11.088,46.582 11.894,45.776 14.609,45.776 15.976,44.409 15.976,41.328 18.484,38.821 36.816,38.821 38.079,40.084 38.079,45.58 37.2,46.459 37.2,48.1 37.7,48.6 v1(38.4,48.6)
RXD0: J18.6 J19.6 | length 47.4
  Bot w0.152: J18.6 7.9,52.8 10.313,55.213 10.313,59.526 11.574,60.787 13.926,60.787 14.755,59.958 35.657,59.958 36.595,59.021 36.987,59.021 41,55.008 J19.6
RXD1: J18.5 J19.5 | length 47
  Top w0.152: J18.5 6.3,44.8 6.6,44.5 v1(6.6,44.2) ; v1(41,43.6) J19.5
  Bot w0.152: v1(6.6,44.2) 7.338,44.938 14.262,44.938 15.138,44.062 15.138,40.981 18.137,37.982 37.236,37.982 41,41.746 v1(41,43.6)
SIM_CLK: IC75.30 R45.1 | length 2.5
  Top w0.152: IC75.30 22.353,39.853 v1(22.7,40.2)
  Bot w0.152: R45.1 22.37,39.87 v1(22.7,40.2)
SIM_DATA: IC75.29 R46.1 | length 5.5
  Top w0.152: v1(23.4,40.7) 23.453,40.647 IC75.29
  Bot w0.152: R46.1 23.101,40.999 v1(23.4,40.7)
SIM_GND: C36.2 IC75.31 J12.C5 | length 28.6
  Top w0.152: v1(13.976,55.4) 13.976,56.876 14.626,57.526 J12.C5 ; v1(20.9,42.2) 21.253,41.847 IC75.31 v1(21.253,37.2)
  Bot w0.152: v1@13.908,55.4 13.908,47.268 16.535,44.64 16.535,42.965 17.3,42.2 v1(20.9,42.2) ; v1(21.253,37.2) 21.8,37.2 22.851,36.149 C36.2
SIM_RST: IC75.28 R44.1 | length 2.2
  Top w0.152: IC75.28 24.553,39.833 24.9,40.181 v1(24.9,40.3)
  Bot w0.152: 24.4,40.281 24.881,40.281 v1(24.9,40.3)
SIM_VCC: C36.1 C40.2 IC9.6 IC75.27 J12.C1 | length 27.5
  Top w0.152: v1(25.6,37.1) 25.6,38.678 IC75.27 25.6,38.783 v1(25.6,40.5) ; v1(26.8,55.8) 28.592,57.592 J12.C1
  Bot w0.152: C36.1 25.097,35.413 C40.2 25.257,36.757 v1(25.6,37.1) ; v1(25.6,40.5) 25.111,40.989 IC9.6 25.722,52.522 26.3,53.1 26.3,53.159 26.453,53.312 26.453,54.212 26.553,54.312 26.553,54.688 26.3,54.941 26.3,55.3 v1(26.8,55.8)
SIMCLK: C38.2 IC9.3 J12.C3 R45.2 | length 31
  Top w0.152: v1(28.9,53.9) 29.708,53.9 J12.C3
  Bot w0.152: R45.2 21.955,42.345 21.5,42.8 21.5,51.3 21.872,51.672 23.308,51.672 23.736,52.1 23.736,54.364 23.678,54.422 IC9.3 22.761,55.061 23.953,56.253 26.988,56.253 27.465,55.776 27.698,55.776 28.9,54.574 v1(28.9,53.9) 28.9,50.9 28.119,50.119 C38.2
SIMDATA: C37.2 IC9.1 J12.C7 R46.2 | length 21.3
  Top w0.152: J12.C7 14.738,53.7 v1(15.6,53.7) ; v1(21,51) v1(22.1,51)
  Bot w0.152: v1(15.6,53.7) 16.5,53.7 17.477,52.723 C37.2 18.745,50.145 20.2,51.6 ; v1(21,51) 20.8,51 20.2,51.6 ; v1(22.1,51) 22.161,50.939 R46.2 ; IC9.1 21.122,52.522 20.2,51.6
SIMRST: C39.2 IC9.4 J12.C2 R44.2 | length 22.2
  Top w0.152: v1(26.1,54.5) 26.869,54.5 28.721,56.352 J12.C2
  Bot w0.152: R44.2 24.317,51.741 24.136,51.922 24.136,54.136 24.422,54.422 IC9.4 26.022,54.422 v1(26.1,54.5) ; v1(27.566,55.1) 27.841,54.826 C39.2
STATUS: IC75.12 R54.2 T3.1 | length 28.9
  Top w0.152: v1(38.6,22.5) 38.681,22.581 IC75.12
  Bot w0.152: T3.1 27.241,8.727 R54.2 28.502,8.298 29.163,7.637 29.163,7.604 30.467,6.3 34.3,6.3 36.2,8.2 36.2,10.1 37.1,11 37.1,21 v1(38.6,22.5)
TX_EN: J18.8 J19.8 | length 53.5
  Bot w0.152: J18.8 4.053,48.853 6.888,48.853 6.941,48.8 9.495,48.8 10.497,47.798 10.497,47.016 10.651,46.862 11.204,46.862 12.01,46.056 14.725,46.056 16.256,44.525 16.256,41.444 18.6,39.1 36.7,39.1 37.8,40.2 37.8,45.464 36.921,46.343 36.921,48.216 37.758,49.053 40.747,49.053 J19.8
TXD0: J18.7 J19.7 | length 52.5
  Bot w0.152: J18.7 9.857,50.8 11.1,52.043 11.1,59.2 11.9,60 13.6,60 14.429,59.171 35.331,59.171 36.269,58.233 36.661,58.233 37.343,57.551 37.343,56.249 37.306,56.212 37.306,51.353 37.859,50.8 J19.7
TXD1: J18.10 J19.10 | length 46.1
  Bot w0.152: J18.10 4.418,45.218 14.378,45.218 15.418,44.178 15.418,41.097 18.253,38.262 37.121,38.262 40.4,41.541 40.4,44.2 J19.10
U1_CTS: J16.6 R49.2 | length 34.5
  Top w0.152: v1(32.1,63.2) 33.948,61.352 33.948,59.295 33.753,59.1 v1(33.753,57.3)
  Bot w0.152: v1(32.1,63.2) 32.1,65.1 34.3,67.3 J16.6 ; R49.2 32.721,43.321 33.753,44.353 v1(33.753,57.3)
U1_RTS: J16.4 R52.2 | length 26.8
  Top w0.152: v1(34.401,56.7) 34.421,56.7 35.621,57.899 35.621,61.052 36.952,62.383 38.113,62.383 38.779,61.716 38.779,61.3 J16.4
  Bot w0.152: R52.2 33.788,43.088 34.401,43.701 v1(34.401,56.7)
U1_RXD: J16.3 R48.2 | length 26.6
  Top w0.152: v1(34.68,57.6) 35.341,58.261 35.341,61.167 37.474,63.3 J16.3
  Bot w0.152: v1(34.68,57.6) 34.68,57.062 34.854,56.888 34.854,56.512 34.68,56.338 34.68,42.9 34.88,42.7 R48.2
U1_TXD: J16.5 R47.2 | length 27.2
  Top w0.152: v1(35.773,56.9) 35.773,57.2 35.9,57.327 35.9,60.936 37.067,62.103 37.733,62.103 38.203,61.633 38.203,60.016 38.919,59.3 J16.5
  Bot w0.152: v1(35.773,56.9) 35.667,56.794 35.667,42.706 35.973,42.4 R47.2
pads on no net: IC75.1 IC75.2 IC75.3 IC75.4 IC75.5 IC75.6 IC75.7 IC75.8 IC75.9 IC75.11 IC75.14 IC75.15 IC75.16 IC75.17 IC75.18 IC75.20 IC75.25 IC75.26 IC75.32 IC75.41 IC75.42 J12.C6 J15.3 J15.4 J15.5 J15.6 J15.7 J21.1 J21.2 J21.7 J21.9 J22.1 J22.2 J22.7 J22.9 LD2.3 LD11.3

## Polygon pours and split planes (outlines as drawn)
GND on Top "Signal Layer 1-No Net 1" (solid, remove dead copper, pour order 4): 0,72.8 45,72.8 45,0 0.1,0 0.05,0.05
GSM_POW on Top "Signal Layer 1-No Net 1" (solid, pour order 0): 9.6,15.1 10.5,14.2 13.84,14.2 15.2,15.56 15.2,31.347 15.553,31.7 15.572,31.681 20.381,31.681 20.8,32.1 20.8,35.5 19.5,36.8 11.1,36.8 9.6,35.3
GND on Bot "Signal Layer 1-No Net 1" (solid, remove dead copper, pour order 2): 0,72.8 45,72.8 45,0 0.1,0 0.05,0.05

## Keep-outs
Top:
  lines w0.1: 0,0.9 33.7,0.9 ; 0,71.9 33.7,71.9 ; 6,14.5 6.646,14.5 7.2,13.946 7.2,10.6 12.9,4.9 33.8,4.9 36.2,7.3 36.2,9 38.1,10.9 38.1,13.746 38.854,14.5 ; 11.227,0.9 44.927,0.9 ; 11.227,71.9 44.927,71.9
Bot:
  lines w0.1: 0,2.65 33.35,2.65 ; 0,70.15 33.65,70.15 ; 6,14.5 7.7,14.5 9.2,13 9.2,10.2 13.4,6 34.9,6 36.6,7.7 36.6,10.021 37.4,10.821 37.4,13.9 38.439,14.939 39,14.939 ; 11.227,2.65 44.577,2.65 ; 11.227,70.15 44.877,70.15
KeepOutLayer:
  lines w0.1: 1.5,4.5 0,4.5 ; 3.4,47.6 5.459,47.6 5.48,47.622 5.48,47.934 ; 5.7,58.3 0,58.3 0,53.8 6,53.8 ; 5.7,60.1 5.7,60.5 ; 5.8,62.2 5.8,62.6 ; 5.8,64 5.8,64.5 ; 5.9,45.5 5.9,46.1 ; 5.9,49.5 5.9,50.1 ; 5.9,52.1 5.9,51.6 6,51.5 ; 5.9,66.2 5.9,66.4 ; 6,8.4 6,8.8 ; 6,10.4 6,10.8 ; 6,12.3 6,12.8 ; 7.6,68.3 0,68.3 ; 38.8,4.5 45,4.5 ; 39,10.2 39,10.8 ; 39,12.2 39,12.8 ; 39,14.5 45,14.5 ; 39,49.5 39,50.1 ; 39,51.6 39,52 ; 39,58.3 45,58.3 45,53.8 ; 39,60 39,60.447 ; 39,62.188 39,62.6 ; 39,64 39,64.5 ; 39.1,45.6 39.1,46 ; 39.3,47.7 39.3,48 ; 41.4,53.9 41.5,53.8 43.5,53.8 45,53.8 ; 41.7,43.8 45,43.8 ; 0,0 0,4.5 ; 0,0 0,0 ; 0,0 45,0 ; 0,4.5 0,4.5 ; 0,4.5 0,0.1 0.1,0 45,0 ; 0,4.5 6,4.5 ; 0,14.5 0,43.8 5.9,43.8 ; 0,14.5 0,14.5 ; 0,14.5 6,14.5 ; 0,68.3 0,72.8 ; 0,68.3 0,68.3 ; 0,72.8 45,72.8 ; 0,72.8 0,72.8 ; 5.9,43.8 5.9,43.8 ; 6,4.5 6,4.5 ; 6,14.5 6,14.5 ; 6,53.8 6,53.8 ; 39,68.3 45,68.3 45,72.8 ; 39,68.3 39,68.3 ; 45,0 45,4.5 ; 45,0 45,0 ; 45,0 45,4.5 ; 45,14.5 45,14.5 ; 45,14.5 45,43.8 ; 45,43.8 45,43.8 ; 45,53.8 45,53.8 ; 45,72.8 45,72.8

## Other copper
Top:
  rectangle net P5V0: 10.7,47.1 12.1,49.6
  rectangle net P5V0: 10.9,42.4 12.8,44.5
  rectangle net P5V0: 11.9,56.666 13.35,59.3
  rectangle net P12V0: 36.275,64.575 38.1,66
Bot:
  rectangle net GSM_POW: 9.8,26.9 12.4,28.3
  rectangle net GND: 5.4,35.6 11.5,41.8
  rectangle net P5V0: 10.7,47.1 12.1,49.6
  rectangle net P5V0: 11.9,56.6 13.3,59.3
  rectangle net P5V0: 10.9,42.2 13,44.5
  rectangle net P12V0: 7.8,64.6 10,65.9
  rectangle net P12V0: 36.275,64.575 38.1,66
  rectangle net GND: 7.9,30.1 9.1,36.4

## Silkscreen, mask and mechanical layers (free items; w line width, h text height)
TopOverlay:
  text "SIM CARD" at 17.17,62.713 h1.5
  text "GPRS Interface" at 13.233,44.348 h1.5
  text "v1.0" at 20.787,41.579 h1.52
  text "STAT" at 22.457,13.884 h1.5
  text "Online" at 29.743,13.843 h1.5
  text "GPRS / Antenna" at 11.811,7.925 h1.5
Mechanical1:
  lines w0.1: 43.5,43.8 43.5,43.8
  lines w0.2: 0,43.8 0,14.5 ; 0,14.5 0,14.5
  lines w0.254: 0,14.5 1.5,14.5 1.5,11.2 1.9,10.8 4.572,10.8 4.572,10.2 1.975,10.2 1.5,9.725 1.5,4.5 0,4.5 0,0 45,0 45,4.5 43.5,4.5 43.5,9.9 43.2,10.2 40.4,10.2 40.4,10.8 43.1,10.8 43.5,11.2 43.5,14.5 45,14.5 45,43.8 43.5,43.8 43.5,49.2 43.4,49.3 43.2,49.5 40.4,49.5 40.4,50.1 43.1,50.1 43.5,50.5 43.5,53.8 45,53.8 45,58.3 43.5,58.3 43.5,63.7 43.4,63.8 43.2,64 40.4,64 40.4,64.6 43.1,64.6 43.5,65 43.5,68.3 45,68.3 45,72.8 0,72.8 0,68.3 1.5,68.3 1.5,65 1.9,64.6 4.6,64.6 4.6,64 1.9,64 1.5,63.6 1.5,58.3 0,58.3 0,53.8 1.5,53.8 1.5,50.5 1.9,50.1 4.6,50.1 4.6,49.8 4.6,49.5 1.9,49.5 1.5,49.1 1.5,43.8 0,43.8

## Text inside footprints (layer, text, board x,y; h text height)
J15: TopOverlay "5" at 6.825,58.52 h1.2; TopOverlay "1" at 7.125,66.5 h1.2; BottomOverlay "10" at 6.95,59.72 h1.2 r180; BottomOverlay "6" at 7.25,67.7 h1.2 r180
J16: TopOverlay "1" at 37.775,66.68 h1.2; TopOverlay "5" at 37.475,58.7 h1.2; BottomOverlay "6" at 37.65,67.88 h1.2 r180; BottomOverlay "10" at 36.6,59.9 h1.2 r180
J18: TopOverlay "5" at 6.825,44.02 h1.2; TopOverlay "1" at 7.125,52 h1.2; BottomOverlay "10" at 6.95,45.22 h1.2 r180; BottomOverlay "6" at 7.25,53.2 h1.2 r180
J19: TopOverlay "1" at 37.775,52.18 h1.2; TopOverlay "5" at 37.475,44.2 h1.2; BottomOverlay "6" at 37.65,53.38 h1.2 r180; BottomOverlay "10" at 36.6,45.4 h1.2 r180
J21: TopOverlay "5" at 6.825,4.72 h1.2; TopOverlay "1" at 7.125,12.7 h1.2; BottomOverlay "10" at 6.95,5.92 h1.2 r180; BottomOverlay "6" at 7.25,13.9 h1.2 r180
J22: TopOverlay "1" at 37.775,12.88 h1.2; TopOverlay "5" at 37.475,4.9 h1.2; BottomOverlay "6" at 37.65,14.08 h1.2 r180; BottomOverlay "10" at 36.6,6.1 h1.2 r180